# Altium PCB board.PcbDoc
Units mil, origin at the board's own origin, x right, y up, seen from the top; angles counter-clockwise.
Board outline 6000 x 4000 mil, 2 copper layers (Top Layer, Bottom Layer); 31 components, 39 nets, 158 pads, 0 vias.
Unrouted connection lines stored in the file: 56.
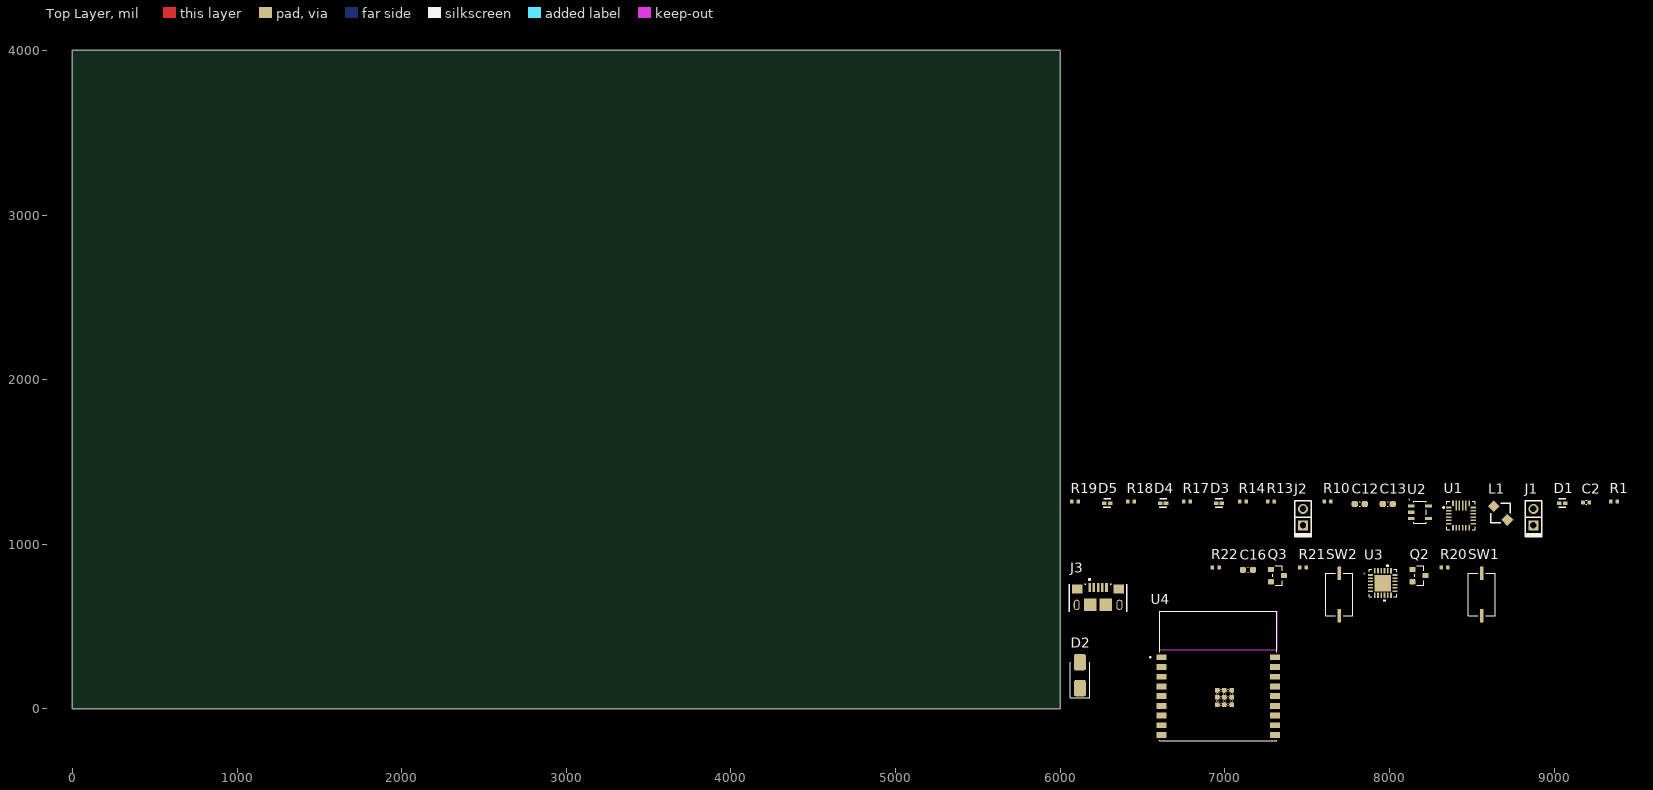
[diagram p0: Top Layer view]
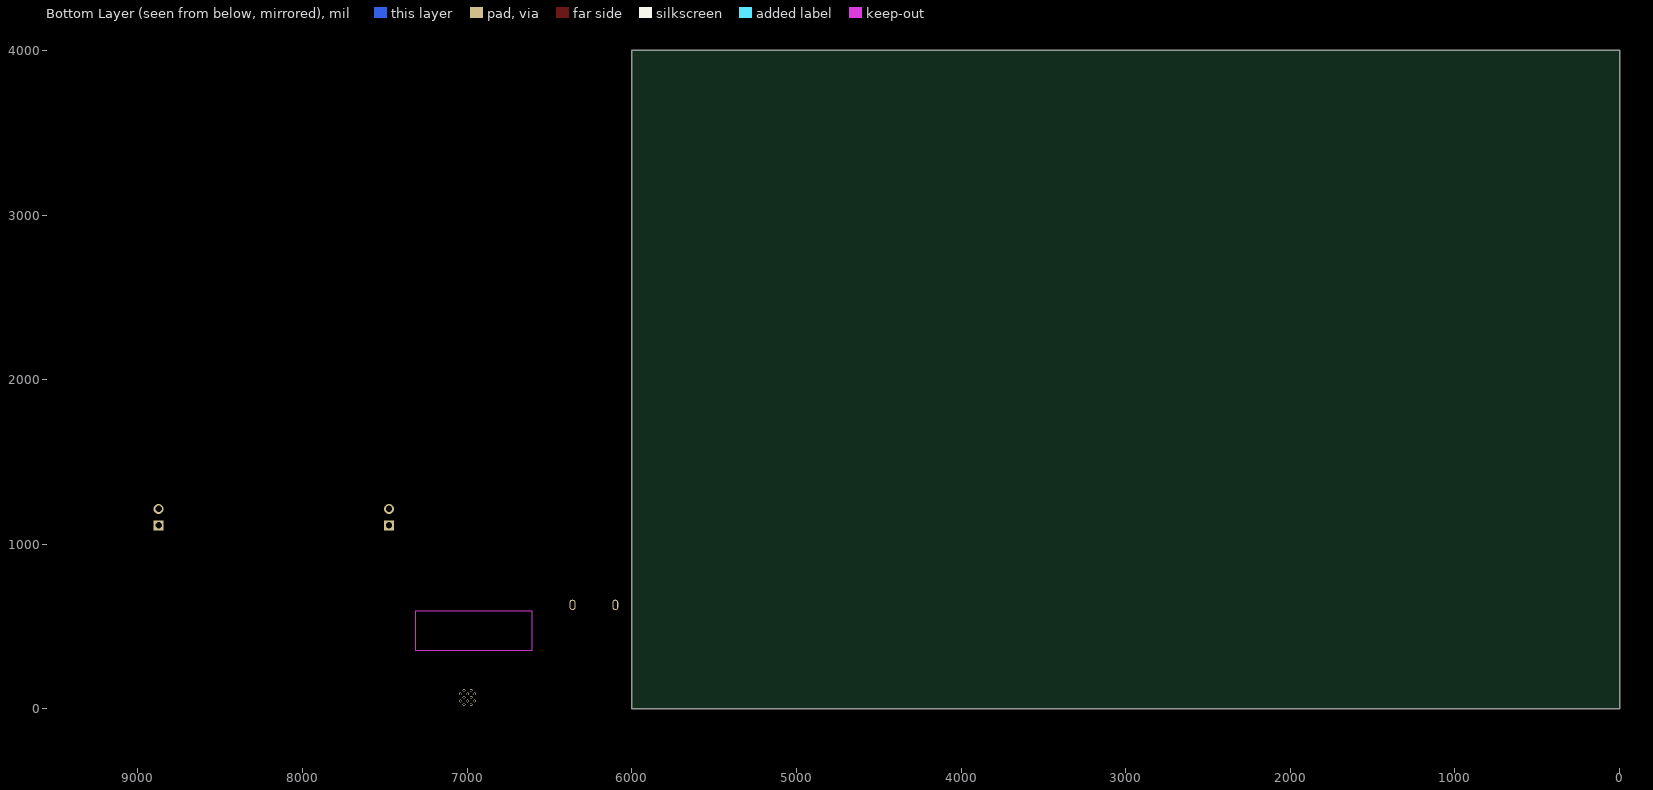
[diagram p1: Bottom Layer view, seen from below]

## Layer stack, top to bottom
Top Solder: solder mask 0.4, Solder Resist, Dk 3.5
Top Layer: signal copper 1.4
Dielectric 1: dielectric 12.6, FR-4, Dk 4.8
Bottom Layer: signal copper 1.4
Bottom Solder: solder mask 0.4, Solder Resist, Dk 3.5

## Board outline
0,0 6000,0 6000,4000 0,4000

## Design rules (kind name [scope] priority, off if disabled: settings)
Clearance [All] p1: gap=10 ignorepadtopadclearanceinfootprint=FALSE except(0: Arc-Hole Track-Hole SMDPad-Hole THPad-Hole Via-Hole Fill-Hole Poly-Hole Region-Hole Text-Hole)
DiffPairsRouting [All] p1: maxlimit=10 minlimit=10 mostfreqgap=10 toplayer_minwidth=15 toplayer_maxwidth=15 toplayer_prefwidth=15 bottomlayer_minwidth=15 bottomlayer_maxwidth=15 bottomlayer_prefwidth=15 maxuncoupledlength=500
PolygonConnect [All] p1: connectstyle=Relief reliefconductorwidth=10 reliefentries=4 polygonreliefangle="90 Angle" airgapwidth=10
RoomDefinition top [InComponentClass('top')] p1: confinementstyle=ConfineIn formatcopy=TRUE lockcomponents=FALSE outline 6045,1035 9115,1035 9115,1840 6045,1840
RoomDefinition power [InComponentClass('power')] p2: confinementstyle=ConfineIn formatcopy=TRUE lockcomponents=FALSE outline 6045,65 9455,65 9455,1840 6045,1840
RoomDefinition mcu [InComponentClass('mcu')] p3: confinementstyle=ConfineIn formatcopy=TRUE lockcomponents=FALSE outline 6045,65 9455,65 9455,1385 6045,1385
RoutingVias [All] p1: holewidth=28 width=50 viastyle="Through Hole" minholewidth=28 minwidth=50 maxholewidth=28 maxwidth=50
SolderMaskExpansion [All] p1: expansion=4 istentingtop=FALSE
Width [All] p1: maxlimit=10 minlimit=10 preferedwidth=10
29 further rules are at their usual default settings.

## Classes and differential pairs
component class top: J3
component class power: C2 C13 D1 D2 D3 D4 J1 J2 L1 R1 R10 R13 R14 R17 R18 R19 U1
component class mcu: C16 Q2 Q3 R10 R20 R22 SW1 SW2 U3 U4
differential pair D: +D_P -D_N

## Components (designator, comment, footprint, x,y, rotation, side; value= is the part's Value field where it differs from the comment)
C2 "Capacitor_Ceramic" C_0402_1005Metric_IPCB 9195,1255 r0 top value=120p
C12 "Capacitor_Ceramic" C_0603_1608Metric_IPCB 7820,1245 r0 top value=1u
C13 "Capacitor_Ceramic" C_0603_1608Metric_IPCB 7990,1245 r0 top value=1u
C16 "Capacitor_Ceramic" C_0603_1608Metric_IPCB 7140,845 r0 top value=10u
D1 "Diode_LED" LED_0402 9050,1250 r0 top value=Green
D2 "Diode_Schottky" D_SMA_IPCB 6120,205 r90 top
D3 "Diode_LED" LED_0402 6965,1250 r0 top value=Green
D4 "Diode_LED" LED_0402 6625,1250 r0 top value=Green
D5 "Diode_LED" LED_0402 6285,1250 r0 top value=Green
J1 "Conn_01x02" PinHeader_1x02_P2.54mm_Vertical 8875,1115 r90 top
J2 "Conn_01x02" PinHeader_1x02_P2.54mm_Vertical 7475,1115 r90 top
J3 "Amphenol_10118193-0001LF_Micro_USB" Amphenol_10118193-0001LF_Micro_USB 6230,635 r0 top
L1 "Inductor" Sumida_CDRH2D18-HPNP-2R2NC 8675,1190 r0 top value=2u2
Q2 "BJT_NPN_BEC" SOT23-3_Standard_IPCB 8180,810 r0 top
Q3 "BJT_NPN_BEC" SOT23-3_Standard_IPCB 7320,810 r0 top
R1 "Resistor" R_0402_1005Metric_IPCB 9365,1260 r0 top value=2k49
R10 "Resistor" R_0402_1005Metric_IPCB 7625,1260 r0 top value=10k
R13 "Resistor" R_0402_1005Metric_IPCB 7280,1260 r0 top value=10k
R14 "Resistor" R_0402_1005Metric_IPCB 7110,1260 r0 top value=47k5
R17 "Resistor" R_0402_1005Metric_IPCB 6770,1260 r0 top value=2k49
R18 "Resistor" R_0402_1005Metric_IPCB 6430,1260 r0 top value=2k49
R19 "Resistor" R_0402_1005Metric_IPCB 6090,1260 r0 top value=2k49
R20 "Resistor" R_0402_1005Metric_IPCB 8335,860 r0 top value=10k
R21 "Resistor" R_0402_1005Metric_IPCB 7475,860 r0 top value=10k
R22 "Resistor" R_0402_1005Metric_IPCB 6945,860 r0 top value=1k
SW1 "SW_Single_NO_BridgingPads" Pushbutton_PTS636_SM25F_SMTR_LFS 8560,695 r90 top
SW2 "SW_Single_NO_BridgingPads" Pushbutton_PTS636_SM25F_SMTR_LFS 7695,695 r90 top
U1 "MP2637GR" MP2637GR 8435,1175 r0 top
U2 "NCP115ASN330T2G" NCP115ASN330T2G 8185,1195 r0 top
U3 "CP2102N_QFN24" CP2102N_QFN24 7960,765 r0 top
U4 "ESP32-C3-WROOM-02-H4" ESP32-C3-WROOM-02-H4 6960,200 r0 top

## Footprints (in the part's own frame and the unit in brackets; to place one, negate y for a bottom-side part, rotate by r counter-clockwise, add the part's x,y. Pads: shape width x height; smd on the part's side, far side on the other; paste and mask are expansions set on the pad)
Amphenol_10118193-0001LF_Micro_USB [mm]
  rect 0.4x1.35 smd paste+0 mask+0: 1(-1.3,2.605) 2(-0.65,2.605) 3(0,2.605) 4(0.65,2.605) 5(1.3,2.605)
  rect 1.6x1.4 smd paste+0 mask+0: 6(-3.2,2.38) 7(3.2,2.38)
  rrect100% 0.9x1.6 hole 1.2 slot 0.5 at 0 deg paste-1000 mask+0: 8(-3.3,-0.07) 11(3.3,-0.07)
  rect 1.9x1.9 smd paste+0 mask+0: 9(-1.2,-0.07) 10(1.2,-0.07)
  silkscreen extent -4.43,-1.12 4.43,3.98, body extent -4.13,-3.18 4.13,3.38, height 0.25
C_0402_1005Metric_IPCB [mm] "Chip Capacitor, 2-Leads, Body 1.00x0.50mm, IPC Medium Density"
  rrect50% 0.56x0.62 smd: 1(-0.48,0) 2(0.48,0)
  silkscreen extent -0.06,-0.3 0.06,0.3, body extent -0.5,-0.25 0.5,0.25, height 0.5
C_0603_1608Metric_IPCB [mm] "Chip Capacitor, 2-Leads, Body 1.60x0.80mm, IPC Medium Density"
  rrect50% 0.95x0.9 smd: 1(-0.775,0) 2(0.775,0)
  silkscreen extent -0.05,-0.38 0.05,0.38, body extent -0.8,-0.4 0.8,0.4, height 0.8
CP2102N_QFN24 [mil]
  rect 31.81x10.03 smd paste+0 mask+0: 1(-74.41,49.22) 2(-74.41,29.54) 3(-74.41,9.85) 4(-74.41,-9.85) 5(-74.41,-29.54) 6(-74.41,-49.22) 13(74.41,-49.22) 14(74.41,-29.54) 15(74.41,-9.85) 16(74.41,9.85) 17(74.41,29.54) 18(74.41,49.22)
  rect 10.03x31.81 smd paste+0 mask+0: 7(-49.23,-74.41) 8(-29.53,-74.41) 9(-9.84,-74.41) 10(9.84,-74.41) 11(29.53,-74.41) 12(49.23,-74.41) 19(49.23,74.41) 20(29.53,74.41) 21(9.84,74.41) 22(-9.84,74.41) 23(-29.53,74.41) 24(-49.23,74.41)
  rect 100x100 smd paste-49.5 mask+0: 25(0,0)
  silkscreen extent -84,-110 84,110, body extent -79,-79 79,79, height 32
D_SMA_IPCB [mm]
  rrect25% 2.5x1.8 smd paste+0 mask+0: 1(-2,0) 2(2,0)
  silkscreen extent -3.5,-1.5 2,1.5, body extent -2.5,-1.35 2.5,1.35, height 2.22
ESP32-C3-WROOM-02-H4 [mm]
  rect 1.5x0.9 smd: 1(-8.75,2.9) 2(-8.75,1.4) 3(-8.75,-0.1) 4(-8.75,-1.6) 5(-8.75,-3.1) 6(-8.75,-4.6) 7(-8.75,-6.1) 8(-8.75,-7.6) 9(-8.75,-9.1) 10(8.75,-9.1) 11(8.75,-7.6) 12(8.75,-6.1) 13(8.75,-4.6) 14(8.75,-3.1) 15(8.75,-1.6) 16(8.75,-0.1) 17(8.75,1.4) 18(8.75,2.9)
  rect 0.7x0.7 smd: 19(-0.14,-2.2) 20(0.96,-2.2) 21(2.06,-2.2) 22(-0.14,-3.3) 23(0.96,-3.3) 24(2.06,-3.3) 25(-0.14,-4.4) 26(0.96,-4.4) 27(2.06,-4.4)
  round 0.4 hole 0.3 mask+0: 28(0.41,-2.2) 29(1.51,-2.2) 30(-0.14,-2.75) 31(0.96,-2.75) 32(2.06,-2.75) 33(0.41,-3.3) 34(1.51,-3.3) 35(-0.14,-3.85) 36(0.96,-3.85) 37(2.06,-3.85) 38(0.41,-4.4) 39(1.51,-4.4)
  Keep-Out Layer region: 9,4 -9,4 -9,10 9,10
  Keep-Out Layer region: 9,4 -9,4 -9,10 9,10
  silkscreen extent -10.6,-10 9,10, body extent -9,-10 9,10, height 3.35
LED_0402 [mm]
  rect 0.7x0.5 smd paste+0 mask+0: 1(-0.45,0) 2(0.45,0)
  silkscreen extent -0.56,-0.63 0.55,0.65, body extent -0.5,-0.25 0.5,0.25, height 0.5
MP2637GR [mil]
  rect 32x10 smd paste+0 mask+0: 1(-74.8,49.21) 2(-74.8,29.53) 3(-74.8,9.84) 4(-74.8,-9.84) 5(-74.8,-29.53) 6(-74.8,-49.21) 13(74.8,-49.21) 14(74.8,-29.53) 15(74.8,-9.84) 16(74.8,9.84) 17(74.8,29.53) 18(74.8,49.21)
  rect 10x32 smd: 7(-49.21,-74.8) 8(-29.53,-74.8) 9(-9.84,-74.8) 10(9.84,-74.8) 11(29.53,-74.8) 12(49.21,-74.8) 19(49.21,74.8) 24(-49.21,74.8)
  rect 10x59 smd: 20(29.53,61.3) 21(9.84,61.3) 22(-9.84,61.3) 23(-29.53,61.3)
  silkscreen extent -110,-86 86,86, body extent -79,-79 79,79, height 43
NCP115ASN330T2G [mil]
  rect 40.28x20 smd paste+0 mask+0: 1(-52.64,37.4) 2(-52.64,0) 3(-52.64,-37.4) 4(52.64,-37.4) 5(52.64,37.4)
  silkscreen extent -38,-67 38,67, body extent -59,-62 59,62, height 43
PinHeader_1x02_P2.54mm_Vertical [mm]
  rect 1.55x1.55 hole 1 paste-1000 mask+0: 1(0,0)
  round 1.55 hole 1 paste-1000 mask+0: 2(2.54,0)
  silkscreen extent -1.78,-1.27 3.81,1.27, body extent -1.27,-1.27 3.81,1.27, height 8.54
Pushbutton_PTS636_SM25F_SMTR_LFS [mil]
  rect 82.81x22.03 smd paste+0 mask+0: 1(-129.85,0) 2(129.85,0)
  silkscreen extent -129,-82 129,82, body extent -159,-77 159,77, height 32
R_0402_1005Metric_IPCB [mm] "Chip Resistor, 2-Leads, Body 1.00x0.50mm, IPC Medium Density"
  rrect50% 0.54x0.64 smd: 1(-0.51,0) 2(0.51,0)
  body extent -0.5,-0.25 0.5,0.25, height 0.35
SOT23-3_Standard_IPCB [mm]
  rrect25% 0.9x0.8 smd paste+0 mask+0: 1(-1,0.95) 2(-1,-0.95) 3(1,0)
  silkscreen extent -0.7,-1.52 0.7,1.52, body extent -1.25,-1.5 1.25,1.5, height 1.2
Sumida_CDRH2D18-HPNP-2R2NC [mm]
  rect 1.3x1.3 smd rot 135 paste+0 mask+0: 1(-1.061,1.061) 2(1.061,-1.061)
  silkscreen extent -1.5,-1.5 1.5,1.5, body extent -2.08,-2.08 2.08,2.08, height 0.25

## Part data
C2: library part 20015, "50V 120p 0402 X7R", Package=0402, Internal Number=20015
C12 C13: library part 20016, "16V 1u 0603 X7R", Package=0603, Internal Number=20016
C16: library part 20014, "16V 10u 0603 X5R", Package=0603, Internal Number=20014
D1 D3 D4 D5: library part 40002, "LED 0402 Green", Package=0402, Internal Number=40002
D2: library part 40006, "Schottky 40 V 1A SMA", Manufacturer=onsemi, Manufacturer P/N=SS14, Package=SMA, Internal Number=40006
J1 J2: library part 110001, "01x02 P2.54 PinHeader", Internal Number=110001
J3: library part 110003, "Micro USB B SMD Horisontal", Manufacturer="Amphenol ICC / FCI", Manufacturer P/N=10118193-0001LF, Internal Number=110003
L1: library part 190001, "Inductor 2.2uH 1.6A 60mOhm", Manufacturer=Sumida, Manufacturer P/N=CDRH2D18-HPNP-2R2NC, Internal Number=190001
Q2 Q3: library part 50001, "TRANS NPN 30V 100MA SOT23-3", Manufacturer=onsemi, Manufacturer P/N=BC848BLT3G, Package=SOT23-3, Internal Number=50001
R1 R17 R18 R19: library part 10021, "0402 2k49 1%", Package=0402, Internal Number=10021
R10 R13 R20 R21: library part 10033, "0402 10k 1%", Package=0402, Internal Number=10033
R14: library part 10034, "0402 47k5 1%", Package=0402, Internal Number=10034
R22: library part 10009, "0402 1k 1%", Package=0402, Internal Number=10009
SW1 SW2: library part 100001, Manufacturer=C&K, Manufacturer P/N="PTS636 SM25F SMTR LFS", Internal Number=100001
U1: library part 180003, "MP2637GR Li-ion charger", Manufacturer="Monolithic Power Systems", Manufacturer P/N=MP2637GR-P, Package=QFN, Internal Number=180003
U2: library part 80001, "3V3 LDO 300mA", Manufacturer=onsemi, Package=TSOP5, Internal Number=80001, Manufacturer P/N=NCP115ASN330T2G
U3: library part 90002, "USB to UART", Manufacturer="Silicon Labs", Manufacturer P/N=CP2102N-A02-GQFN24, Package=QFN24, Internal Number=90002
U4: library part 130001, "ESP32 C3 SoC", Package=SoC, Internal Number=130001

## Nets (pads, with @x,y where several pads share a name; then routed paths per layer and width w, separated by ;. In a path a pad name is that pad's centre, name@x,y a point inside that pad or via, vN(x,y) a via of type N, cw(c..) or ccw(c..) an arc to the next point about the centre after c; other vN are vias at no path point)
3V3: R22.1
5V: C12.2 R10.2 U2.1 U2.3
\ACOK: D4.1 U1.11
\BOOST: D5.1 U1.3
\CHG: D3.1 U1.2
CSP: L1.2 U1.4
D-: 
D_N: J3.2 U3.4
D_P: J3.3 U3.3
DTR: Q3.2 R20.1 U3.23
EN: Q2.3 SW1.1
FB: C2.1 U1.10
GND: C12.1 C13.1 C16.1 D1.1 J1.2 J2.2 J3.5 J3.6 J3.7 J3.8 J3.9 J3.10 R13.1 R14.1 SW1.2 SW2.2 U1.1 U1.6 U1.23 U1.24 U2.2 U3.2 U3.25
GPIO9: Q3.3 SW2.1
ILIM: U1.15
ISET: R14.2 U1.8
MODE: U1.19
NetD1_2: D1.2 R1.1
NetD3_2: D3.2 R17.1
NetD4_2: D4.2 R18.1
NetD5_2: D5.2 R19.1
NetQ1_2: 
NetQ2_1: Q2.1 R20.2
NetQ3_1: Q3.1 R21.2
NetR22_2: R22.2 U3.9
NTC: J2.1 R10.1 R13.2 U1.9
OLIM: U1.7
PWIN: U1.14
REG: U1.12
RTS: Q2.2 R21.1 U3.19
RXD: U3.20
SW: L1.1 U1.22
TMR: U1.13
TXD: U3.21
VBATT: J1.1 U1.5
VBUS: U3.8
VCC: R17.2 R18.2 R19.2 U1.16
VIN_RECT: D2.1 U1.20
VUSB: D2.2 J3.1
pads on no net: C2.2 C13.2 C16.2 J3.4 J3.11 R1.2 U1.17 U1.18 U1.21 U2.4 U2.5 U3.1 U3.5 U3.6 U3.7 U3.10 U3.11 U3.12 U3.13 U3.14 U3.15 U3.16 U3.17 U3.18 U3.22 U3.24 U4.1 U4.2 U4.3 U4.4 U4.5 U4.6 U4.7 U4.8 U4.9 U4.10 U4.11 U4.12 U4.13 U4.14 U4.15 U4.16 U4.17 U4.18 U4.19 U4.20 U4.21 U4.22 U4.23 U4.24 U4.25 U4.26 U4.27 U4.28 U4.29 U4.30 U4.31 U4.32 U4.33 U4.34 U4.35 U4.36 U4.37 U4.38 U4.39

## Text inside footprints (layer, text, board x,y; h text height)
U2: Top Assembly "*" at 8150,1204.4 h50; Top Overlay "*" at 8115,1255 h19.68
U3: Top Assembly "*" at 7889,799.07 h50; Top Overlay "*" at 7840,805 h19.68